# EAGLE board brick_serial_ble (EAGLE 7.2.0)
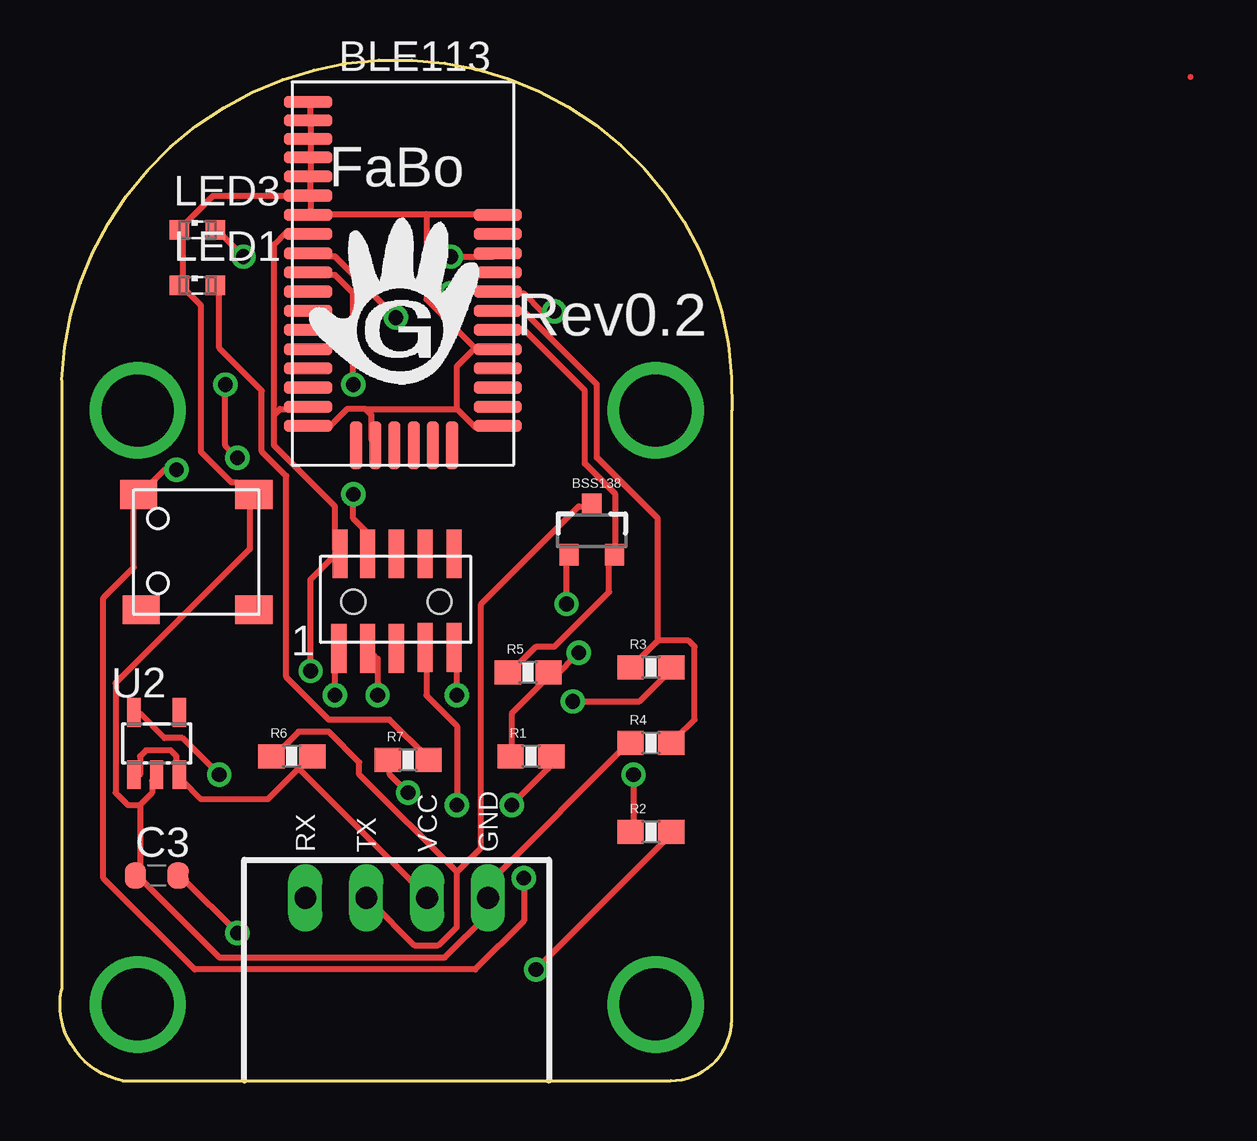
[diagram p0: board, top side]
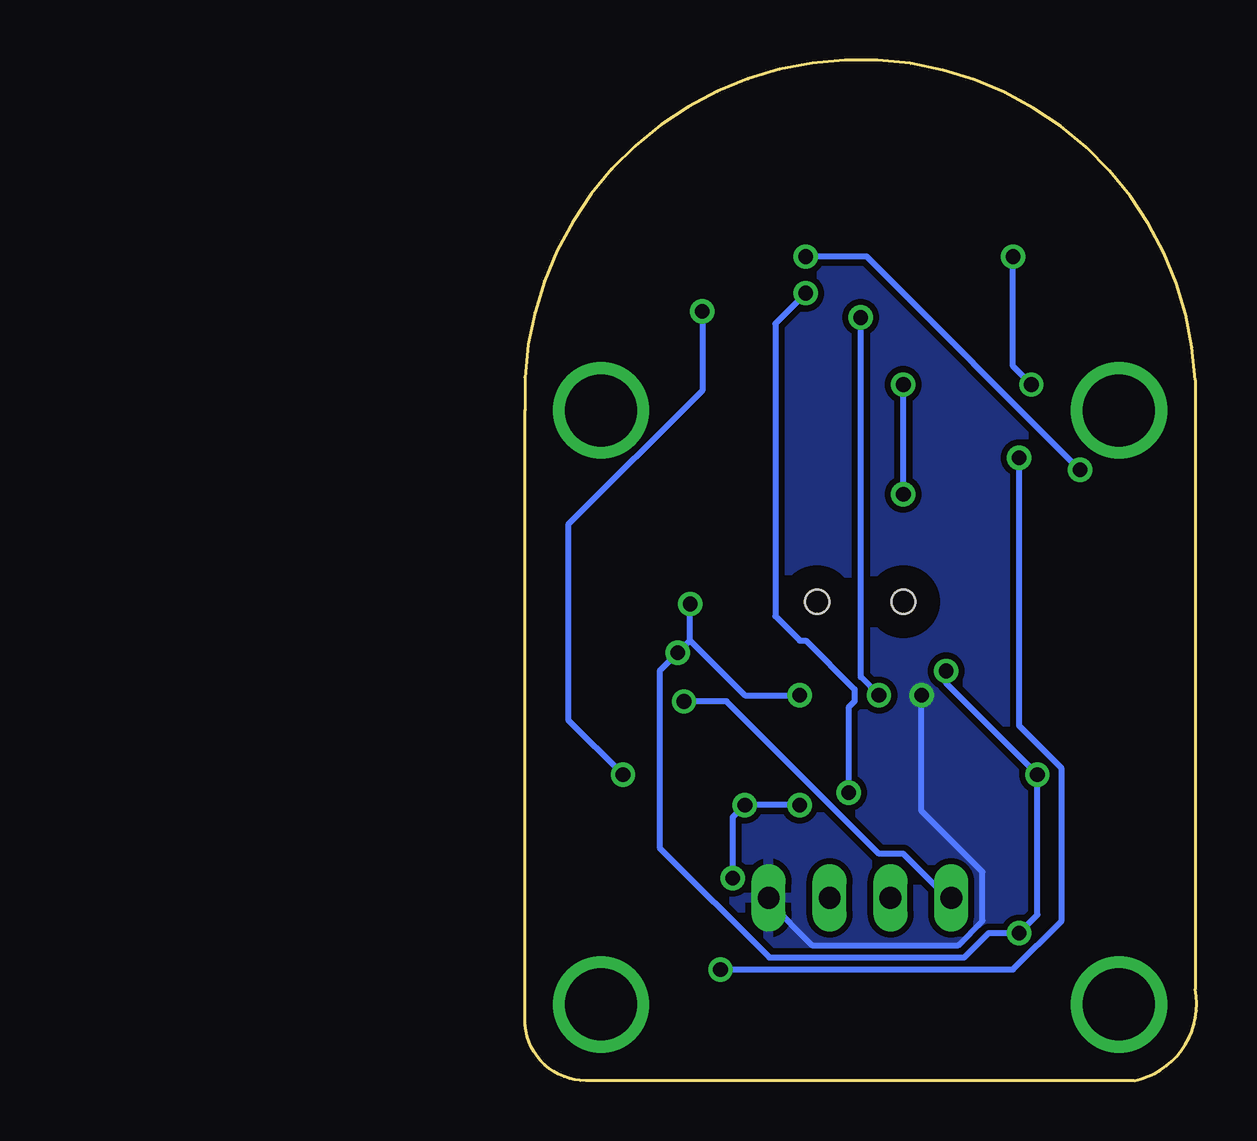
[diagram p1: board, bottom side, seen from below]

Size 28 x 42.55 mm. Coordinates in mm from the lower left corner, seen from the top.
Copper layers (1*16): Top 0.035mm / dielectric 1.5mm / Bottom 0.035mm
Design rules "default": minimum track width 10mil, minimum drill 24mil, track to track 8mil, track to pad 8mil, pad to pad 8mil, via to via 8mil, smd to smd 8mil, copper to edge 40mil, drill to drill 8mil, minimum pad ring 10mil, minimum via ring 8mil, stop-mask expansion 4mil, vias tented up to drill 0mil, thermal gap 10mil
Net classes: 0 default: width 0.254 mm, clearance 0.254 mm; 2 gnd: width 0.305 mm, drill 0.559 mm, clearance 0.254 mm; 3 usbvcc: width 0.508 mm, drill 0.61 mm, clearance 0.254 mm
tKeepout: area 12,36.5 to 30,46.5
bKeepout: area 12,36.5 to 30,46.5

## Footprints (pad centres in the part's own frame; a part is rotated, then mirrored left to right if it is on the bottom)
SOT23-3 = smd 0.8 x 0.9: 1 -0.95,-1; 2 0.95,-1; 3 0,1.1
C0603-ROUND = smd 0.898 x 1.1: 1 -0.889,0; 2 0.889,0
LED_SML0603 = smd 0.8 x 0.8: A 0.75,0; C -0.75,0
0603-RES = smd 1.1 x 1: 1 -0.85,0; 2 0.85,0
SOT23-DBV = smd 0.55 x 1.2: 1 -0.95,-1.3; 2 0,-1.3; 3 0.95,-1.3; 4 0.95,1.3; 5 -0.95,1.3
PIN-HEADER-SMT(1.27MM)2X5 = smd 0.635 x 2.032: 1 -2.4,-1.95; 2 -2.35,2; 3 -1.2,-1.95; 4 -1.2,2; 5 0,-1.95; 6 0,2; 7 1.2,-1.9; 8 1.2,2; 9 2.4,-1.9; 10 2.4,2 | hole 1: 1.8,0; -1.8,0
BRICK_SERIAL = drill 0.9 long: GND 3.81,-11.43; RX -3.81,-11.43; TX -1.27,-11.43; VCC 1.27,-11.43 | drill 3 pad 3.81: P$5 -10.795,8.89; P$6 10.795,8.89; P$7 -10.795,-15.875; P$8 10.795,-15.875
SWICTH-LS6J2M-T = smd 1.55 x 1.2: 1 -2.4,2.4; 2 -2.3,-2.4; 3 2.4,2.4; 4 2.4,-2.4
BLUEGIGA-BLE113 = smd 2 x 0.5: 1 -3.81,6.35; 2 -3.81,5.58; 3 -3.81,4.81; 4 -3.81,4.04; 5 -3.81,3.24; 6 -3.81,2.44; 7 -3.81,1.64; 8 -3.81,0.84; 9 -3.81,0.04; 10 -3.81,-0.76; 11 -3.81,-1.56; 12 -3.81,-2.36; 13 -3.81,-3.16; 14 -3.81,-3.96; 15 -3.81,-4.76; 16 -3.81,-5.56; 17 -3.81,-6.36; 18 -3.81,-7.16; 25 4.09,-7.16; 26 4.09,-6.36; 27 4.09,-5.56; 28 4.09,-4.76; 29 4.09,-3.96; 30 4.09,-3.16; 31 4.09,-2.36; 32 4.09,-1.56; 33 4.09,-0.76; 34 4.09,0.04; 35 4.09,0.84; 36 4.09,1.64 | smd 0.5 x 2: 19 -1.81,-7.96; 20 -1.01,-7.96; 21 -0.21,-7.96; 22 0.59,-7.96; 23 1.39,-7.96; 24 2.19,-7.96

## Placement (x,y rotation side)
BSS138  [SOT23-3]  22.16,22.92 0 top
C3  1u  [C0603-ROUND]  4.03,8.55 0 top
LED1  [LED_SML0603]  5.73,33.15 0 top
LED3  [LED_SML0603]  5.73,35.46 0 top
R1  4.7K  [0603-RES]  19.63,13.52 0 top
R2  180  [0603-RES]  24.63,10.37 0 top
R3  10K  [0603-RES]  24.63,17.22 0 top
R4  10K  [0603-RES]  24.63,14.07 0 top
R5  10K  [0603-RES]  19.51,17.02 0 top
R6  10K  [0603-RES]  9.66,13.52 0 top
R7  180  [0603-RES]  14.51,13.37 0 top
U2  LP2985-33DBVR  [SOT23-DBV]  4.03,14.05 0 top
U$1  PIN-HEADER-SMT(1.27MM)2X5  [PIN-HEADER-SMT(1.27MM)2X5]  14.02,19.96 0 top
U$2  BRICK_SERIAL  [BRICK_SERIAL]  14.03,19.05 0 top
U$4  SWITCH-LS6J2M-T  [SWICTH-LS6J2M-T]  5.68,22.03 0 top
U$6  BLUEGIGA-BLE113  [BLUEGIGA-BLE113]  14.15,34.45 0 top

## Library data of the parts
BSS138 R1-R7 = SparkFun
C3 U2 = SmartPrj
LED1 LED3 = eagle-ltspice; SPICEMODEL: NONE; SPICEPREFIX: D; SPICETYPE: diode
U$1 U$2 U$4 = gclue
U$6 = gclueBT

## Nets
+3V3: BSS138.1 C3.2 R1.1 R5.2 U2.5 U$1.2 U$1.9 U$6.8 U$6.17
+5V: R6.2 U2.1 U2.3 U$2.VCC
DEBUG_CLOCK: U$1.4 U$6.10
DEBUG_DATA: U$1.3 U$6.9
GND: C3.1 LED1.C LED3.C R4.1 U2.2 U$1.1 U$2.GND U$4.3 U$6.1 U$6.2 U$6.3 U$6.4 U$6.5 U$6.6 U$6.7 U$6.18 U$6.20 U$6.25 U$6.29 U$6.36
N$1: LED1.A R7.2
N$2: LED3.A R2.2
NC1: U$6.16
NC2: U$6.35
P0_0: R7.1 U$6.33
P0_1: R2.1 U$6.32
P0_5: U$6.28
P0_6: U$6.27
P0_7: U$6.26
P1_0: U$6.24
P1_1: U$6.23
P1_2: U$6.22
P1_3: U$6.21
P1_5: U$6.19
P2_0: U$6.11
RESET: R1.2 U$1.7 U$4.1 U$6.34
RX2_LV: U$6.12
RX_HV: R3.2 U$2.RX
RX_LV: R3.1 R4.2 U$6.31
SCL: U$6.14
SDA: U$6.15
TX2_LV: U$6.13
TX_HV: BSS138.3 R6.1 U$2.TX
TX_LV: BSS138.2 R5.1 U$6.30

## Tracks (layer width: path | path; a pad name or v marks a point on that pad's centre or on a via)
+3V3  (via drill 0.61)
  Top 0.254: 8.92,27.74 9.18,28 10.19,28 U$6.17 | 8.92,27.74 8.92,26.47 11.46,23.93 11.46,22.16 U$1.2 11.46,21.9 10.45,20.89 v10.45,17.08 | 8.92,27.74 8.92,34.86 9.43,35.36 10.19,35.36 U$6.8 | v21.11,19.87 21.11,21.9 BSS138.1 | v21.62,17.84 20.61,16.82 R5.2 20.35,16.82 18.83,15.3 18.83,13.52 R1.1 | v7.4,6.15 5.11,8.44 C3.2 | v6.64,12.76 5.11,14.28 4.35,14.28 3.33,15.3 U2.5 | v16.54,16.06 16.54,17.84 U$1.9
  Bottom 0.254: 21.11,18.35 v21.11,19.87 | 21.11,18.35 v21.62,17.84 22.38,17.08 22.38,9.71 17.81,5.14 9.68,5.14 8.67,6.15 v7.4,6.15 6.64,6.92 v6.64,12.76 10.45,16.57 v10.45,17.08 | v16.54,16.06 18.83,16.06 21.11,18.35
+5V
  Top 0.254: 9.94,13.01 8.67,11.74 5.87,11.74 5.11,12.5 U2.3 4.86,12.76 4.86,13.52 4.6,13.77 3.59,13.77 3.33,13.52 3.33,12.76 U2.1 | 9.94,13.01 10.45,13.52 R6.2 | 9.94,13.01 15.27,7.68 U$2.VCC
AGND
  Top 0.254: 47.12,41.84
DEBUG_CLOCK  (via drill 0.61)
  Top 0.254: v12.22,29.01 12.22,32.82 11.46,33.59 10.45,33.59 U$6.10 | v12.22,24.44 12.22,23.43 12.73,22.92 12.73,22.16 U$1.4
  Bottom 0.254: v12.22,24.44 v12.22,29.01
DEBUG_DATA  (via drill 0.61)
  Top 0.254: v14,31.81 11.46,34.35 10.45,34.35 U$6.9 | v13.24,16.06 13.24,17.58 12.99,17.84 U$1.3
  Bottom 0.254: v14,31.81 14,16.82 v13.24,16.06
GND  (via drill 0.61)
  Top 0.254: R4.1 23.65,14.03 18.07,8.44 18.07,7.68 U$2.GND 17.81,7.42 17.81,6.92 16.03,5.14 6.64,5.14 3.33,8.44 C3.1 3.33,8.69 3.33,11.49 | v11.46,16.06 11.46,17.84 U$1.1 | 12.73,28 11.97,28 11.21,27.24 10.45,27.24 U$6.18 | 12.73,28 12.99,27.74 12.99,26.73 U$6.20 | 16.54,28 17.3,27.24 18.07,27.24 U$6.25 | 12.73,28 16.54,28 | 17.3,30.54 18.07,30.54 U$6.29 17.3,30.54 | 17.3,30.54 16.54,29.78 16.54,28 | U$6.1 10.45,40.7 10.45,40.19 U$6.2 10.45,39.94 10.45,39.43 U$6.3 10.45,39.17 10.45,38.67 U$6.4 10.45,38.41 10.45,37.9 U$6.5 10.45,37.65 10.45,36.89 | 10.45,36.89 10.45,36.13 | 10.45,36.13 15.27,36.13 | 15.27,36.13 18.07,36.13 U$6.36 | 10.45,36.13 U$6.7 | 10.45,36.89 U$6.6 10.19,36.89 6.38,36.89 5.11,35.62 LED3.C 5.11,35.36 5.11,33.33 LED1.C 5.11,33.08 5.87,32.32 5.87,26.22 7.14,24.95 7.4,24.95 7.91,24.44 U$4.3 7.91,24.19 7.91,22.16 2.32,16.57 2.32,12 2.83,11.49 3.33,11.49 | 17.3,30.54 15.27,32.57 15.27,36.13 | 3.33,11.49 3.84,12 3.84,12.5 U2.2
  Bottom 0.254: v11.46,16.06 11.46,11.23 8.92,8.69 8.92,6.66 9.94,5.65 16.03,5.65 17.81,7.42 U$2.GND
  pour Bottom: -1.47,-0.45 -1.47,45.05 12.03,45.05 12.03,37.05 29.53,37.05 29.53,-0.95 -1.47,-0.95
N$1
  Top 0.254: LED1.A 6.64,33.08 6.64,30.54 8.41,28.76 8.41,26.22 9.43,25.2 9.43,16.82 11.21,15.04 13.75,15.04 15.27,13.52 R7.2
N$2  (via drill 0.61)
  Top 0.254: v7.65,34.35 6.64,35.36 LED3.A | v6.89,29.01 6.89,26.47 v7.4,25.97 | v19.84,4.63 25.43,10.22 R2.2
  Bottom 0.254: v7.65,34.35 7.65,29.78 v6.89,29.01 | v7.4,25.97 7.4,14.79 5.62,13.01 5.62,6.66 7.65,4.63 v19.84,4.63
P0_0  (via drill 0.61)
  Top 0.254: v14.51,12 13.75,12.76 13.75,13.27 R7.1 | v16.29,32.82 17.05,33.59 18.07,33.59 U$6.33
  Bottom 0.254: v14.51,12 14.51,15.55 14.26,15.81 14.26,16.31 16.29,18.35 16.54,18.35 17.56,19.36 17.56,31.55 v16.29,32.82
P0_1  (via drill 0.61)
  Top 0.254: v23.91,12.76 23.91,10.47 R2.1 | v20.61,32.06 20.1,32.06 19.34,32.82 18.32,32.82 U$6.32
  Bottom 0.254: v23.91,12.76 26.19,15.04 26.19,23.17 20.61,28.76 v20.61,32.06
RESET  (via drill 0.61)
  Top 0.254: v18.83,11.49 20.35,13.01 20.35,13.52 R1.2 | v16.54,11.49 16.54,14.79 15.27,16.06 15.27,17.84 U$1.7 | v19.34,8.44 19.34,6.66 17.3,4.63 5.62,4.63 1.81,8.44 1.81,20.12 3.08,21.39 3.08,24.19 U$4.1 3.33,24.44 4.35,25.46 v4.86,25.46 | v16.29,34.35 18.07,34.35 U$6.34
  Bottom 0.254: v16.54,11.49 v18.83,11.49 19.34,10.98 v19.34,8.44 | v16.29,34.35 13.75,34.35 v4.86,25.46
RX_HV  (via drill 0.61)
  Top 0.254: v21.37,15.81 24.16,15.81 25.43,17.08 R3.2
  Bottom 0.254: v21.37,15.81 19.59,15.81 13.24,9.46 12.22,9.46 10.45,7.68 U$2.RX
RX_LV
  Top 0.254: 24.92,18.35 23.91,17.33 R3.1 | 24.92,18.35 26.19,18.35 26.45,18.09 26.45,15.04 25.69,14.28 R4.2 | 24.92,18.35 24.92,23.43 22.38,25.97 22.38,29.01 19.34,32.06 18.32,32.06 U$6.31
TX_HV
  Top 0.254: 16.54,8.69 17.56,9.71 17.56,19.87 21.62,23.93 22.13,23.93 BSS138.3 | 16.54,8.69 16.54,6.41 15.78,5.65 14.76,5.65 12.99,7.42 U$2.TX | 16.54,8.69 12.48,12.76 12.48,13.27 11.21,14.54 9.94,14.54 8.92,13.52 R6.1
TX_LV
  Top 0.254: R5.1 18.83,17.08 19.84,18.09 20.61,18.09 22.89,20.38 22.89,21.9 BSS138.2 23.15,22.16 23.15,24.44 21.88,25.71 21.88,28.76 19.34,31.3 18.32,31.3 U$6.30

## Text on the board
tPlace: Rev0.2